# EAGLE board EcoSmart - Circuits prise intelligente (EAGLE 9.7.0)

Size 291.68 x 131.56 mm. Coordinates in mm from the lower left corner, seen from the top.
Outline: 0,0 291.68,0 291.68,131.56 0,131.56 0,0
Copper layers (1*16): Top 0.035mm / dielectric 1.5mm / Bottom 0.035mm
Design rules "default": minimum track width 6mil, minimum drill 0.35mm, track to track 6mil, track to pad 6mil, pad to pad 6mil, via to via 6mil, smd to smd 6mil, copper to edge 40mil, drill to drill 6mil, minimum pad ring 10mil, minimum via ring 8mil, stop-mask expansion 4mil, vias tented up to drill 0mil, thermal gap 10mil

## Footprints (pad centres in the part's own frame; a part is rotated, then mirrored left to right if it is on the bottom)
BATTERY-GENERIC = drill 1.118 pad 3.15 octagon: + 2.54,0; - -2.54,0
LEDRD254W60D565H860B = drill 0.981 pad 1.581: 1 -1.27,0; 2 1.27,0
WS2812-STRIP = drill 1.016 long: 1 -3.81,0; 2 -1.27,0; 3 1.27,0; 4 3.81,0
RESAD1016W63L850D250B = drill 0.83 pad 1.43: 1 -5.08,0; 2 5.08,0
HA-06-SM065 = drill 1 pad 1.676: 1 -2.54,-2.54; 2 0,2.54; 3 2.54,-2.54
SWITCH-MOMENTARY-PTH-6.5MM = drill 1.016 pad 1.88: 1 -3.251,2.261; 2 3.251,2.261; 3 -3.251,-2.261; 4 3.251,-2.261
ARDUINO-UNO-R3-SHIELD = drill 1.016 pad 1.88: 3.3V 24.13,-2.54; 5V 24.13,0; A0 24.13,12.7; A1 24.13,15.24; A2 24.13,17.78; A3 24.13,20.32; A4 24.13,22.86; A5 24.13,25.4; AREF -24.13,-13.97; D2 -24.13,20.32; D3 -24.13,17.78; D4 -24.13,15.24; D5 -24.13,12.7; D6 -24.13,10.16; D7 -24.13,7.62; D8 -24.13,3.81; D9 -24.13,1.27; D10 -24.13,-1.27; D11 -24.13,-3.81; D12 -24.13,-6.35; D13 -24.13,-8.89; GND@0 24.13,2.54; GND@1 24.13,5.08; GND@2 -24.13,-11.43; IOREF 24.13,-7.62; NC 24.13,-10.16; RES 24.13,-5.08; RX -24.13,25.4; SCL -24.13,-19.05; SDA -24.13,-16.51; TX -24.13,22.86; VIN 24.13,7.62

## Placement (x,y rotation side)
BAT3  9V  [BATTERY-GENERIC]  8.26,68.14 270 top
D1  RED  [LEDRD254W60D565H860B]  66.63,95.98 180 top
LED1  WS2812B_STRIP  [WS2812-STRIP]  285.41,82.16 270 top
R1  1k  [RESAD1016W63L850D250B]  112.43,100.98 90 top
RPOT1  250k  [HA-06-SM065]  174.13,8.26 0 top
S1  SWITCH_MOMENTARY  [SWITCH-MOMENTARY-PTH-6.5MM]  213.88,124.2 90 top
U1  ARDUINO-UNO-R3-SHIELD  [ARDUINO-UNO-R3-SHIELD]  196.37,62.73 270 top

## Library data of the parts
BAT3 LED1 R1 RPOT1 S1 U1 = Tinkercad
D1 = Tinkercad; CATEGORY: Opto-Electronic; SUB-CATEGORY: LED; VALUE: LED_RED

## Nets
BAT3+: BAT3.+ U1.VIN
BAT3-: BAT3.- D1.2 LED1.3 RPOT1.1 U1.GND@0 U1.GND@1 U1.GND@2
D1_A: D1.1 R1.1
U1_5V: LED1.2 RPOT1.3 U1.5V
U1_A0: RPOT1.2 U1.A0
U1_D2: S1.3 U1.D2
U1_D3: R1.2 U1.D3
U1_D5: LED1.1 U1.D5

## Tracks (layer width: path | path; a pad name or v marks a point on that pad's centre or on a via)
BAT3+  (1 unrouted)
BAT3-  (6 unrouted)
D1_A  (1 unrouted)
U1_5V  (2 unrouted)
U1_A0  (1 unrouted)
U1_D2  (1 unrouted)
U1_D3  (1 unrouted)
U1_D5  (1 unrouted)